# Allegro board demoa2.brd
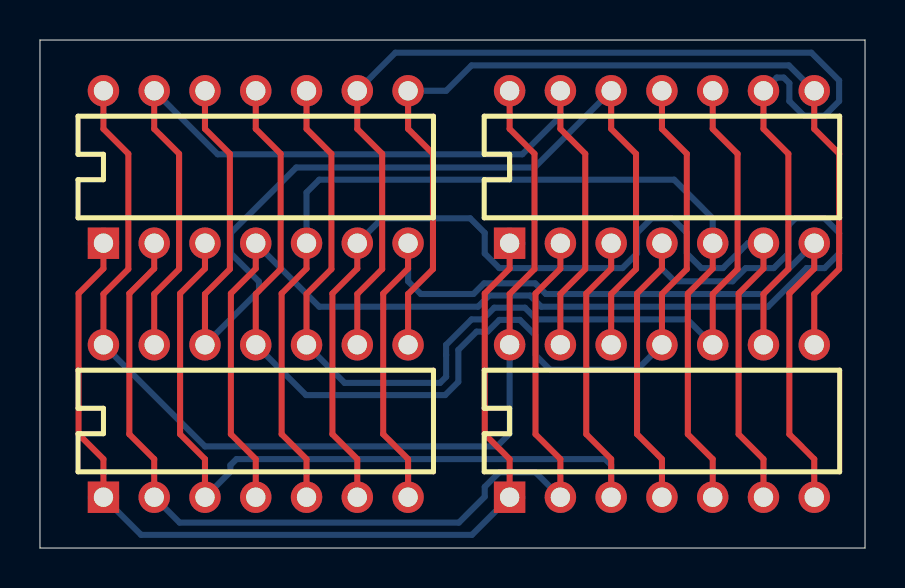
[diagram p0: board, top side]
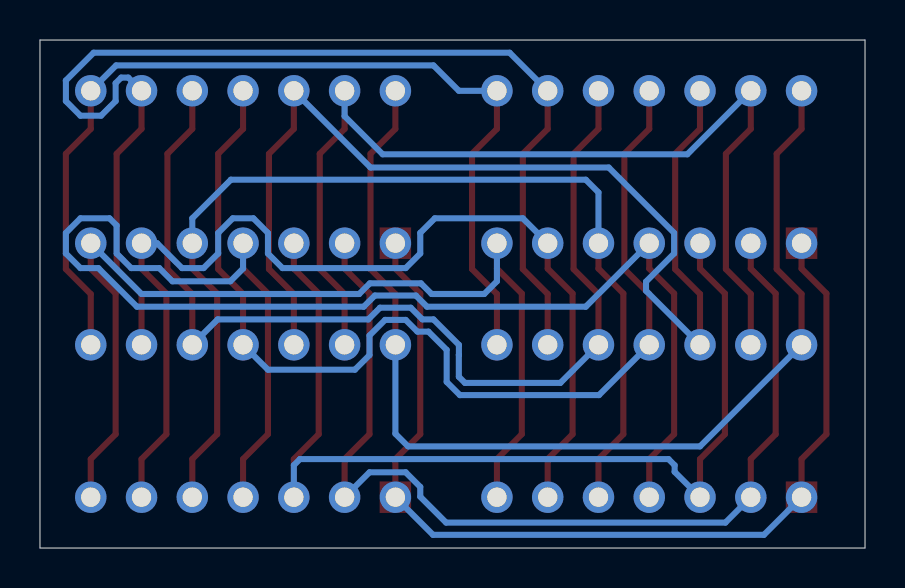
[diagram p1: board, bottom side, seen from below]

Outline 41.27 x 25.4 mm; copper layers: TOP, GND, POWER, INNER1, INNER2, BOTTOM. Coordinates in mm from the lower left corner of the outline.
Outline path: 0,25.4 0,0 41.27,0 41.27,25.4 0,25.4

## Design rules (mm)
nets with their own width: min track width 0.305; nets DAT1 DAT2 DAT3 DAT4 DAT5 DAT6 DAT7 DAT8 DAT9 DAT10 DAT11 DAT12 GND VCC

## Placement (name value [footprint] x y rotation side)
U1  7400  [DIP14]  3.17 15.24 0 top
U2  7400  [DIP14]  23.5 15.24 0 top
U3  7400  [DIP14]  3.17 2.54 0 top
U4  7400  [DIP14]  23.5 2.54 0 top

## Library data of the parts
U1-U4 = 7400

## Footprints (pads in the part's own frame, mm; a bottom-side part is the same pattern mirrored in y, then rotated)
DIP14
  rect 1.575x1.575 hole 0.965: 1(0,0)
  round 1.575 hole 0.965: 2(2.54,0) 3(5.08,0) 4(7.62,0) 5(10.16,0) 6(12.7,0) 7(15.24,0) 8(15.24,7.62) 9(12.7,7.62) 10(10.16,7.62) 11(7.62,7.62) 12(5.08,7.62) 13(2.54,7.62) 14(0,7.62)

## Nets
GND: U1.7(TP-7) U2.7(TP-7) U3.7(TP-7) U4.7(TP-7)
VCC: U1.14(TP-14) U2.14(TP-14) U3.14(TP-14) U4.14(TP-14)
DAT1: U1.2(TP-2) U2.2(TP-2) U3.2(TP-2) U4.2(TP-2)
DAT2: U1.1(TP-1) U2.1(TP-1) U3.1(TP-1) U4.1(TP-1)
DAT3: U1.3(TP-3) U2.3(TP-3) U3.3(TP-3) U4.3(TP-3)
DAT4: U1.5(TP-5) U2.5(TP-5) U3.5(TP-5) U4.5(TP-5)
DAT5: U1.4(TP-4) U2.4(TP-4) U3.4(TP-4) U4.4(TP-4)
DAT6: U1.6(TP-6) U2.6(TP-6) U3.6(TP-6) U4.6(TP-6)
DAT7: U1.10(TP-10) U2.10(TP-10) U3.10(TP-10) U4.10(TP-10)
DAT8: U1.9(TP-9) U2.9(TP-9) U3.9(TP-9) U4.9(TP-9)
DAT9: U1.8(TP-8) U2.8(TP-8) U3.8(TP-8) U4.8(TP-8)
DAT10: U1.13(TP-13) U2.13(TP-13) U3.13(TP-13) U4.13(TP-13)
DAT11: U1.12(TP-12) U2.12(TP-12) U3.12(TP-12) U4.12(TP-12)
DAT12: U1.11(TP-11) U2.11(TP-11) U3.11(TP-11) U4.11(TP-11)

## Routing (per net, layer and track width the routed paths; a pad name or vN(x,y) marks a point on that pad's centre or on a via; arc(x,y) is an arc through that point)
GND: length 51.4
  TOP w0.305: U2.7 38.73,13.97 37.49,12.73 37.49,5.69 38.73,4.45 U4.7 ; U3.7 18.42,4.45 17.17,5.69 17.17,12.73 18.42,13.97 U1.7
  BOTTOM w0.305: U2.7 36.2,12.7 25.31,12.7 24.77,13.23 22.22,13.23 21.68,12.7 19.05,12.7 18.42,13.34 U1.7
VCC: length 54.6
  TOP w0.305: U3.14 3.17,12.7 4.42,13.94 4.42,19.71 3.17,20.95 U1.14 ; U2.14 23.5,20.95 24.74,19.71 24.74,13.94 23.5,12.7 U4.14
  BOTTOM w0.305: U3.14 8.26,5.08 22.86,5.08 23.5,5.71 U4.14
DAT1: length 50.2
  TOP w0.305: U4.2 26.04,4.45 24.79,5.69 24.79,12.73 26.04,13.97 U2.2 ; U1.2 5.71,13.97 4.47,12.73 4.47,5.69 5.71,4.45 U3.2
  BOTTOM w0.305: U4.2 24.79,3.78 22.98,3.78 22.25,3.06 22.25,2.57 20.96,1.27 6.98,1.27 U3.2
DAT2: length 49.3
  TOP w0.305: U4.1 23.5,4.45 22.25,5.69 22.25,12.73 23.5,13.97 U2.1 ; U1.1 3.17,13.97 1.93,12.73 1.93,5.69 3.17,4.45 U3.1
  BOTTOM w0.305: U4.1 21.61,0.66 5.06,0.66 U3.1
DAT3: length 50.5
  TOP w0.305: U1.3 8.26,13.97 7.01,12.73 7.01,5.69 8.26,4.45 U3.3 ; U4.3 28.58,4.45 27.33,5.69 27.33,12.73 28.58,13.97 U2.3
  BOTTOM w0.305: U4.3 28.58,4.14 28.27,4.45 9.83,4.45 9.53,4.14 9.53,3.81 U3.3
DAT4: length 52.6
  TOP w0.305: U2.5 33.66,13.97 32.41,12.73 32.41,5.69 33.66,4.45 U4.5 ; U1.5 13.33,13.97 12.09,12.73 12.09,5.69 13.33,4.45 U3.5
  BOTTOM w0.305: U1.5 13.33,17.78 13.97,18.41 31.72,18.41 33.66,16.48 U2.5
DAT5: length 73.4
  TOP w0.305: U2.4 31.12,13.97 29.87,12.73 29.87,5.69 31.12,4.45 U4.4 ; U3.4 10.79,4.45 9.55,5.69 9.55,12.73 10.79,13.97 U1.4
  BOTTOM w0.305: U1.4 13.97,12.06 21.91,12.06 22.47,12.62 24.52,12.62 25.08,12.06 36.42,12.06 38.35,14 39.25,14 39.98,14.72 39.98,15.76 39.25,16.48 37.8,16.48 37.44,16.13 37.44,14.72 36.71,14 35.31,14 34.65,13.34 31.75,13.34 31.12,13.97 U2.4
DAT6: length 53.7
  TOP w0.305: U2.6 36.2,13.97 34.95,12.73 34.95,5.69 36.2,4.45 U4.6 ; U1.6 15.88,13.97 14.63,12.73 14.63,5.69 15.88,4.45 U3.6
  BOTTOM w0.305: U2.6 35.42,15.24 34.17,14 33.09,14 32.36,14.72 32.36,15.76 31.63,16.48 30.6,16.48 29.87,15.76 29.87,14.72 29.14,14 22.98,14 22.25,14.72 22.25,15.76 21.52,16.48 17.12,16.48 U1.6
DAT7: length 51.8
  TOP w0.305: U2.10 33.66,20.95 34.9,19.71 34.9,13.94 33.66,12.7 U4.10 ; U1.10 13.33,20.95 14.58,19.71 14.58,13.94 13.33,12.7 U3.10
  BOTTOM w0.305: U3.10 15.24,8.26 20.02,8.26 20.32,8.56 20.32,9.65 20.32,9.65 20.32,10.16 21.59,11.43 22.14,11.43 22.73,12.01 24.26,12.01 24.85,11.43 32.38,11.43 U4.10
DAT8: length 59.6
  TOP w0.305: U3.9 15.88,12.7 17.12,13.94 17.12,19.71 15.88,20.95 U1.9 ; U2.9 36.2,20.95 37.44,19.71 37.44,13.94 36.2,12.7 U4.9
  BOTTOM w0.305: U2.9 36.86,23.52 37.21,23.52 37.49,23.24 37.49,22.34 38.22,21.62 39.25,21.62 39.98,22.34 39.98,23.38 38.59,24.77 17.78,24.77 U1.9
DAT9: length 48.8
  TOP w0.305: U2.8 38.73,20.95 39.98,19.71 39.98,13.94 38.73,12.7 U4.8 ; U3.8 18.42,12.7 19.66,13.94 19.66,19.71 18.42,20.95 U1.8
  BOTTOM w0.305: U2.8 37.46,24.13 21.59,24.13 20.32,22.86 U1.8
DAT10: length 51.2
  TOP w0.305: U2.13 26.04,20.95 27.28,19.71 27.28,13.94 26.04,12.7 U4.13 ; U1.13 5.71,20.95 6.96,19.71 6.96,13.94 5.71,12.7 U3.13
  BOTTOM w0.305: U1.13 8.89,19.68 24.13,19.68 26.04,21.59 U2.13
DAT11: length 56.7
  TOP w0.305: U4.12 28.58,12.7 29.82,13.94 29.82,19.71 28.58,20.95 U2.12 ; U3.12 8.26,12.7 9.5,13.94 9.5,19.71 8.26,20.95 U1.12
  BOTTOM w0.305: U2.12 24.74,19.02 12.82,19.02 9.55,15.76 9.55,14.72 10.96,13.32 10.96,12.86 U3.12
DAT12: length 53.4
  TOP w0.305: U4.11 31.12,12.7 32.36,13.94 32.36,19.71 31.12,20.95 U2.11 ; U3.11 10.79,12.7 12.04,13.94 12.04,19.71 10.79,20.95 U1.11
  BOTTOM w0.305: U4.11 29.87,8.92 25.52,8.92 24.79,9.64 24.79,10.62 24.01,11.4 22.98,11.4 22.39,10.82 21.84,10.82 20.93,9.91 20.93,8.31 20.27,7.65 13.31,7.65 U3.11
